# Altium PCB Gate_Driver.PcbDoc
Units mm, origin at the board's own origin, x right, y up, seen from the top; angles counter-clockwise.
Board outline 229.36 x 127 mm, 2 copper layers (Top Layer, Bottom Layer); 105 components, 64 nets, 306 pads, 40 vias.
Unrouted connection lines stored in the file: 133.
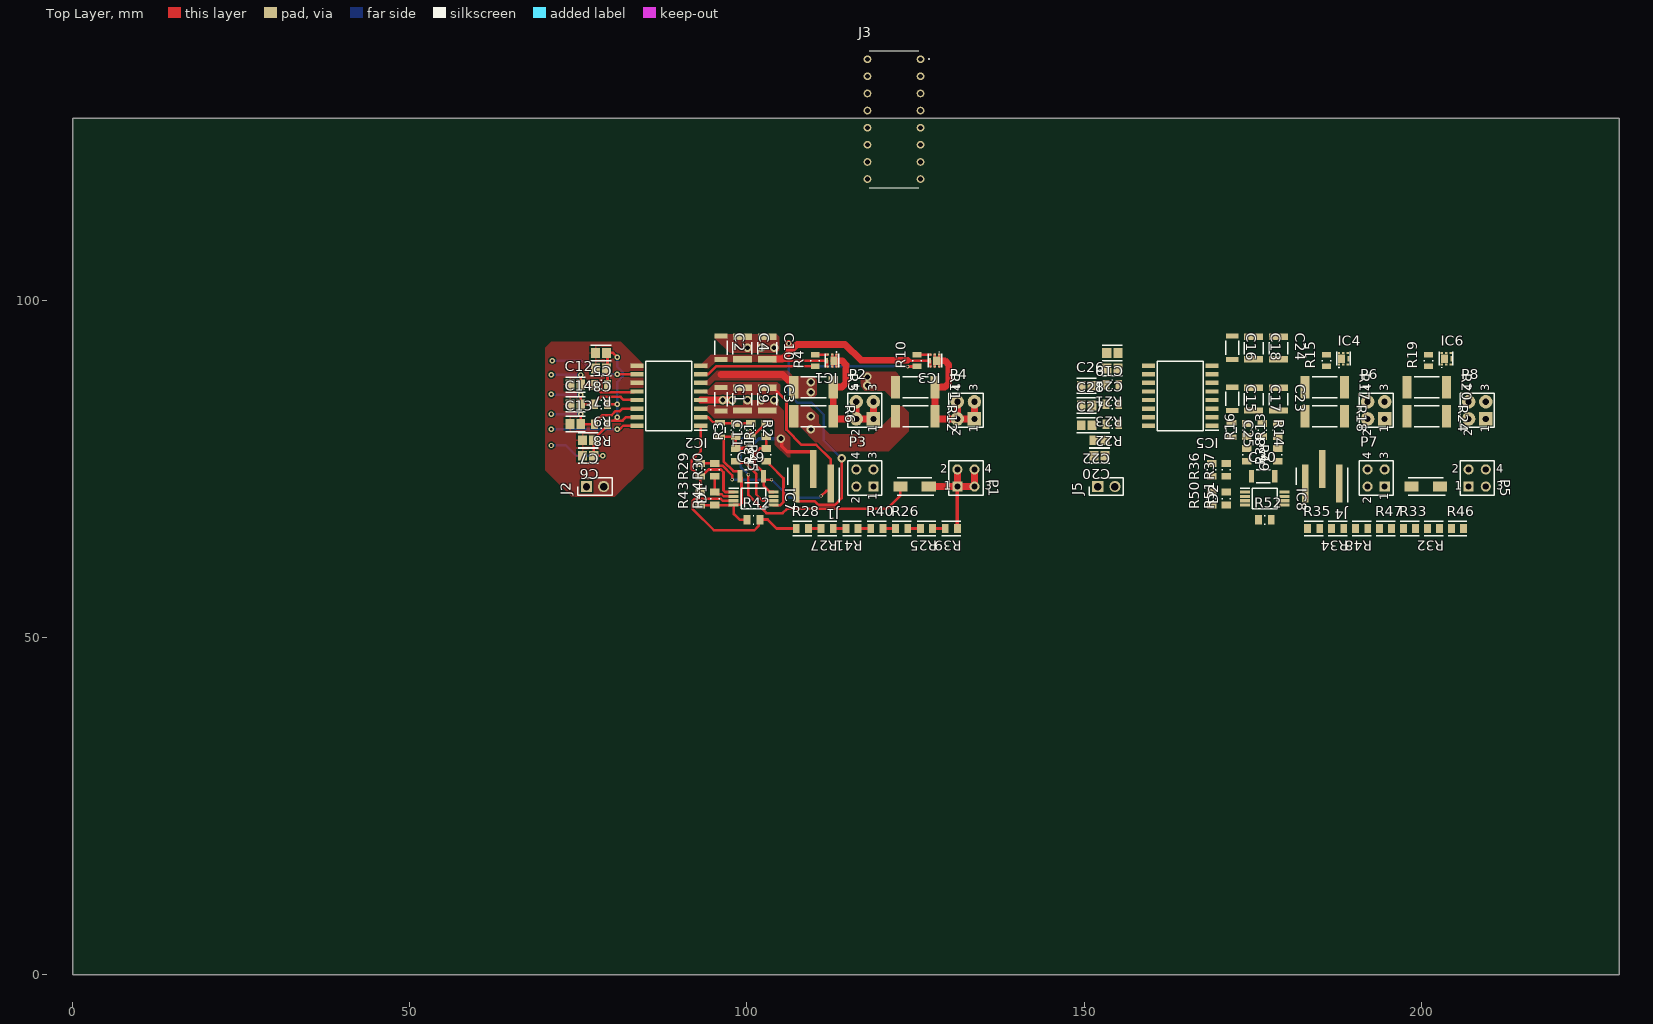
[diagram p0: Top Layer view]
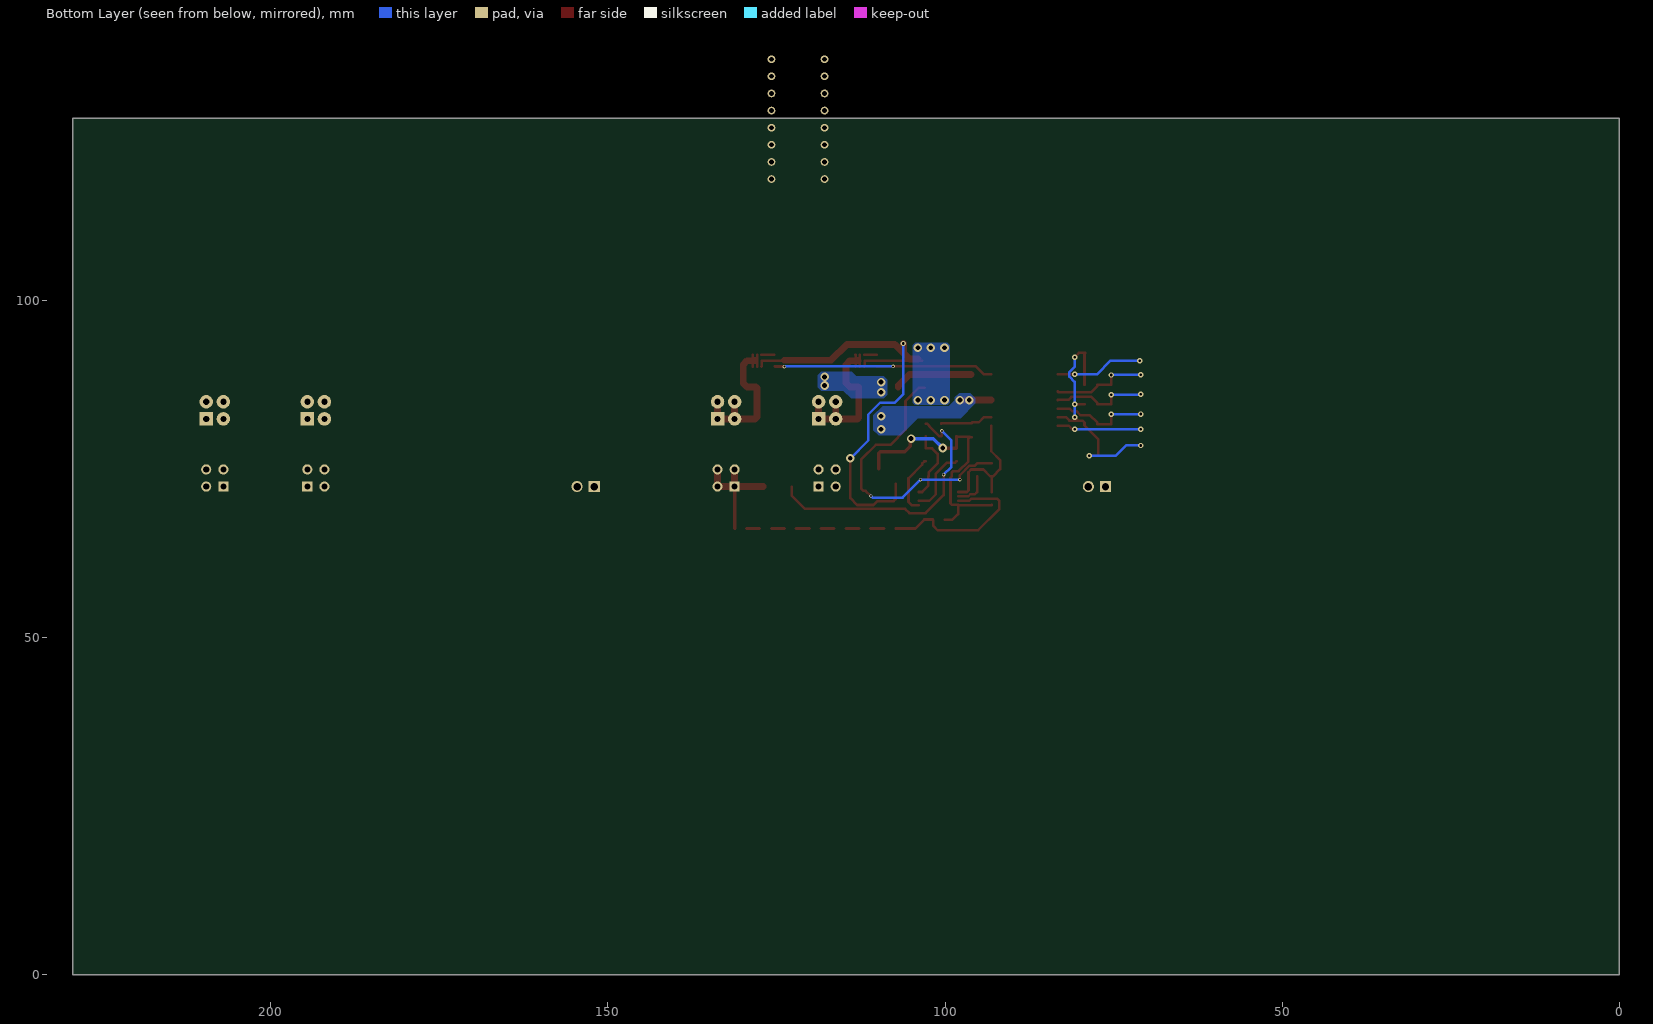
[diagram p1: Bottom Layer view, seen from below]

## Layer stack, top to bottom
Top Solder: solder mask 0.0102, Solder Resist, Dk 3.5
Top Layer: signal copper 0.0356
Dielectric 1: dielectric 0.32, FR-4, Dk 4.8
Bottom Layer: signal copper 0.0356
Bottom Solder: solder mask 0.0102, Solder Resist, Dk 3.5

## Board outline
0,0 229.362,0 229.362,127 0,127

## Design rules (kind name [scope] priority, off if disabled: settings)
Clearance [All] p1: gap=0.2 ignorepadtopadclearanceinfootprint=FALSE except(0: Arc-Hole Track-Hole SMDPad-Hole THPad-Hole Via-Hole Fill-Hole Poly-Hole Region-Hole Text-Hole)
PolygonConnect [All] p1: connectstyle=Direct reliefconductorwidth=0.254 reliefentries=4 polygonreliefangle="90 Angle" airgapwidth=0.254
RoutingVias [All] p1: holewidth=0.4 width=0.8 viastyle="Through Hole" minholewidth=0.3 minwidth=0.5 maxholewidth=3 maxwidth=6
SolderMaskExpansion [All] p1: expansion=0.102
Width [All] p1: maxlimit=1.016 minlimit=0.381 preferedwidth=0.508 minimp=50.000000 maximp=50.000000 favimp=50.000000
30 further rules are at their usual default settings.

## Components (designator, comment, footprint, x,y, rotation, side; value= is the part's Value field where it differs from the comment)
C1 "CGA5L2NP01H104J160AA" FP-CGA5L-0_3-0_1-IPC_B 96.139,85.344 r270 top
C2 "CGA5L2NP01H104J160AA" FP-CGA5L-0_3-0_1-IPC_B 96.139,92.964 r270 top
C3 "CGA6P1X8R1E106K250AC" FP-CGA6P-IPC_B 102.997,85.344 r270 top
C4 "CGA6P1X8R1E106K250AC" FP-CGA6P-IPC_B 99.314,92.916 r270 top
C5 "GCJ21BL81E105KA01L" FP-GCJ21B-0_3-IPC_B 78.359,92.202 r180 top
C6 "GCJ21BL81E105KA01L" FP-GCJ21B-0_3-IPC_B 76.454,76.962 r180 top
C7 "GCJ21BL81H104KA01L" FP-GCJ21B-0_3-IPC_B 76.454,79.248 r180 top
C8 "GCJ21BL81H104KA01L" FP-GCJ21B-0_3-IPC_B 78.359,89.916 r180 top
C9 "CGA6P1X8R1E106K250AC" FP-CGA6P-IPC_B 99.314,85.344 r270 top
C10 "CGA6P1X8R1E106K250AC" FP-CGA6P-IPC_B 102.997,92.916 r270 top
C11 "CGA4C4NP02W122J060AA" FP-CGA4J-IPC_B 96.012,80.772 r270 top
C12 "C0805C101J5HACAUTO" FP-C0805C-DN-IPC_B 74.549,87.503 r0 top value="100 pF"
C13 "C0805C101J5HACAUTO" FP-C0805C-DN-IPC_B 74.549,81.661 r0 top value="100 pF"
C14 "C0805C101J5HACAUTO" FP-C0805C-DN-IPC_B 74.549,84.582 r0 top value="100 pF"
C15 "CGA5L2NP01H104J160AA" FP-CGA5L-0_3-0_1-IPC_B 171.958,85.392 r270 top
C16 "CGA5L2NP01H104J160AA" FP-CGA5L-0_3-0_1-IPC_B 171.958,92.964 r270 top
C17 "CGA6P1X8R1E106K250AC" FP-CGA6P-IPC_B 175.133,85.344 r270 top
C18 "CGA6P1X8R1E106K250AC" FP-CGA6P-IPC_B 175.133,92.916 r270 top
C19 "GCJ21BL81E105KA01L" FP-GCJ21B-0_3-IPC_B 154.178,92.202 r180 top
C20 "GCJ21BL81E105KA01L" FP-GCJ21B-0_3-IPC_B 152.273,76.962 r180 top
C21 "GCJ21BL81H104KA01L" FP-GCJ21B-0_3-IPC_B 154.178,89.916 r180 top
C22 "GCJ21BL81H104KA01L" FP-GCJ21B-0_3-IPC_B 152.273,79.248 r180 top
C23 "CGA6P1X8R1E106K250AC" FP-CGA6P-IPC_B 178.816,85.344 r270 top
C24 "CGA6P1X8R1E106K250AC" FP-CGA6P-IPC_B 178.816,92.916 r270 top
C25 "CGA4C4NP02W122J060AA" FP-CGA4J-IPC_B 171.831,80.773 r270 top
C26 "C0805C101J5HACAUTO" FP-C0805C-DN-IPC_B 150.368,87.329 r0 top value="100 pF"
C27 "C0805C101J5HACAUTO" FP-C0805C-DN-IPC_B 150.368,81.487 r0 top value="100 pF"
C28 "C0805C101J5HACAUTO" FP-C0805C-DN-IPC_B 150.368,84.408 r0 top value="100 pF"
C29 "CGA5L2NP01H104J160AA" FP-CGA5L-0_3-0_1-IPC_B 100.711,73.914 r0 top
C30 "CGA5L2NP01H104J160AA" FP-CGA5L-0_3-0_1-IPC_B 176.53,73.914 r0 top
D1 "RS1M_M2G" DIOM5126X250N 124.841,72.39 r180 top
D2 "RS1M_M2G" DIOM5126X250N 200.66,72.39 r180 top
IC1 "IRFHS8342TRPBF" PQFN(2X2) 113.623,91.059 r180 top
IC2 "UCC21736QDWRQ1" SOIC127P1030X265-16N 88.418,85.852 r180 top
IC3 "IRFHS8342TRPBF" PQFN(2X2) 128.863,91.059 r180 top
IC4 "IRFHS8342TRPBF" PQFN(2X2) 187.442,91.352 r0 top
IC5 "UCC21736QDWRQ1" SOIC127P1030X265-16N 164.237,85.852 r180 top
IC6 "IRFHS8342TRPBF" PQFN(2X2) 202.682,91.352 r0 top
IC7 "LM2903EPWRQ1" SOP65P640X120-8N 100.965,70.612 r0 top
IC8 "LM2903EPWRQ1" SOP65P640X120-8N 176.784,70.612 r0 top
J1 "HW-03-08-T-S-250-SM" HUSRSP3W64P254_762X254X1054P 109.855,73.914 r180 top
J2 "HW-02-08-T-S-250-SM" HDRV2W64P0X254_1X2_508X254X1206P 76.2,72.39 r180 top
J3 "BCS-108-L-D-HE" BCS-108-XXX-D-HE 125.73,135.763 r90 top
J4 "HW-03-08-T-S-250-SM" HUSRSP3W64P254_762X254X1054P 185.293,73.914 r180 top
J5 "HW-02-08-T-S-250-SM" HDRV2W64P0X254_1X2_508X254X1206P 152.019,72.39 r180 top
P1 "Header 2X2" HDR2X2#1 131.191,72.39 r0 top
P2 "Header 2X2" HDR2X2#2 118.745,82.423 r90 top
P3 "Header 2X2" HDR2X2#1 118.745,72.39 r90 top
P4 "Header 2X2" HDR2X2#2 133.731,82.423 r90 top
P5 "Header 2X2" HDR2X2#1 207.01,72.39 r0 top
P6 "Header 2X2" HDR2X2#2 194.564,82.423 r90 top
P7 "Header 2X2" HDR2X2#1 194.564,72.39 r90 top
P8 "Header 2X2" HDR2X2#2 209.55,82.423 r90 top
R1 "CRCW08055K60FKEA" FP-CRCW0805-e3-IPC_B 102.87,80.772 r90 top
R2 "CRCW080510K0FKEA" FP-CRCW0805-e3-IPC_B 100.584,80.772 r270 top
R3 "CRCW08051K60JNEA" FP-CRCW0805-e3-IPC_B 98.298,80.772 r90 top
R4 "CRCW080522R0FKEA" FP-CRCW0805-e3-IPC_C 110.109,91.059 r90 top
R5 "CRCW25124R70JNEG" FP-CRCW2512-e3-IPC_B 109.855,87.122 r0 top
R6 "CRCW25124R30JNEG" FP-CRCW2512-e3-IPC_B 109.855,82.804 r0 top
R7 "CRCW08055K60FKEA" FP-CRCW0805-e3-IPC_B 78.359,87.503 r180 top
R8 "CRCW08055K60FKEA" FP-CRCW0805-e3-IPC_B 78.359,81.661 r180 top
R9 "CRCW08055K60FKEA" FP-CRCW0805-e3-IPC_B 78.359,84.582 r180 top
R10 "CRCW080522R0FKEA" FP-CRCW0805-e3-IPC_C 125.222,91.059 r90 top
R11 "CRCW25124R70JNEG" FP-CRCW2512-e3-IPC_B 124.968,87.122 r0 top
R12 "CRCW25124R30JNEG" FP-CRCW2512-e3-IPC_B 124.968,82.804 r0 top
R13 "CRCW08055K60FKEA" FP-CRCW0805-e3-IPC_B 178.689,80.772 r90 top
R14 "CRCW080510K0FKEA" FP-CRCW0805-e3-IPC_B 176.403,80.772 r270 top
R15 "CRCW080522R0FKEA" FP-CRCW0805-e3-IPC_C 185.928,91.059 r90 top
R16 "CRCW08051K60JNEA" FP-CRCW0805-e3-IPC_B 174.117,80.772 r90 top
R17 "CRCW25124R70JNEG" FP-CRCW2512-e3-IPC_B 185.674,87.122 r0 top
R18 "CRCW25124R30JNEG" FP-CRCW2512-e3-IPC_B 185.674,82.804 r0 top
R19 "CRCW080522R0FKEA" FP-CRCW0805-e3-IPC_C 201.041,91.059 r90 top
R20 "CRCW25124R70JNEG" FP-CRCW2512-e3-IPC_B 200.787,87.122 r0 top
R21 "CRCW08055K60FKEA" FP-CRCW0805-e3-IPC_B 154.178,87.503 r180 top
R22 "CRCW08055K60FKEA" FP-CRCW0805-e3-IPC_B 154.178,81.661 r180 top
R23 "CRCW08055K60FKEA" FP-CRCW0805-e3-IPC_B 154.178,84.582 r180 top
R24 "CRCW25124R30JNEG" FP-CRCW2512-e3-IPC_B 200.787,82.804 r0 top
R25 "RT0805BRD07200KL" FP-RT0805-IPC_B 126.619,66.167 r180 top value=200K?
R26 "RT0805BRD07200KL" FP-RT0805-IPC_B 122.936,66.167 r0 top value=200K?
R27 "RT0805BRD07200KL" FP-RT0805-IPC_B 111.887,66.167 r180 top value=200K?
R28 "RT0805BRD07200KL" FP-RT0805-IPC_B 108.204,66.167 r0 top value=200K?
R29 "CRCW080510K0FKEA" FP-CRCW0805-e3-IPC_B 93.091,74.865 r90 top
R30 "CRCW080510K0FKEA" FP-CRCW0805-e3-IPC_B 95.25,74.865 r90 top
R31 "CRCW080510K0FKEA" FP-CRCW0805-e3-IPC_B 102.87,77.089 r90 top
R32 "RT0805BRD07200KL" FP-RT0805-IPC_B 201.803,66.167 r180 top value=200K?
R33 "RT0805BRD07200KL" FP-RT0805-IPC_B 198.247,66.167 r0 top value=200K?
R34 "RT0805BRD07200KL" FP-RT0805-IPC_B 187.579,66.167 r180 top value=200K?
R35 "RT0805BRD07200KL" FP-RT0805-IPC_B 184.023,66.167 r0 top value=200K?
R36 "CRCW080510K0FKEA" FP-CRCW0805-e3-IPC_B 168.91,74.865 r90 top
R37 "CRCW080510K0FKEA" FP-CRCW0805-e3-IPC_B 171.069,74.865 r90 top
R38 "CRCW080510K0FKEA" FP-CRCW0805-e3-IPC_B 178.689,77.089 r90 top
R39 "RT0805BRD07200KL" FP-RT0805-IPC_B 130.302,66.167 r180 top value=200K?
R40 "RT0805BRD07200KL" FP-RT0805-IPC_B 119.253,66.167 r0 top value=200K?
R41 "RT0805BRD07200KL" FP-RT0805-IPC_B 115.57,66.167 r180 top value=200K?
R42 "CRCW080510K0FKEA" FP-CRCW0805-e3-IPC_B 100.965,67.437 r0 top
R43 "CRCW08055K60FKEA" FP-CRCW0805-e3-IPC_B 93.091,70.612 r90 top
R44 "CRCW08055K60FKEA" FP-CRCW0805-e3-IPC_B 95.25,70.612 r90 top
R45 "CRCW080510K0FKEA" FP-CRCW0805-e3-IPC_B 98.298,77.089 r270 top
R46 "RT0805BRD07200KL" FP-RT0805-IPC_B 205.359,66.167 r0 top value=200K?
R47 "RT0805BRD07200KL" FP-RT0805-IPC_B 194.691,66.167 r0 top value=200K?
R48 "RT0805BRD07200KL" FP-RT0805-IPC_B 191.135,66.167 r180 top value=200K?
R49 "CRCW080510K0FKEA" FP-CRCW0805-e3-IPC_B 174.117,77.089 r270 top
R50 "CRCW08055K60FKEA" FP-CRCW0805-e3-IPC_B 168.91,70.612 r90 top
R51 "CRCW08055K60FKEA" FP-CRCW0805-e3-IPC_B 171.069,70.612 r90 top
R52 "CRCW080510K0FKEA" FP-CRCW0805-e3-IPC_B 176.784,67.437 r0 top

## Footprints (in the part's own frame and the unit in brackets; to place one, negate y for a bottom-side part, rotate by r counter-clockwise, add the part's x,y. Pads: shape width x height; smd on the part's side, far side on the other; paste and mask are expansions set on the pad)
BCS-108-XXX-D-HE [mm]
  round 1.15 hole 0.71: 1(0,0) 2(0,7.87) 3(-2.54,0) 4(-2.54,7.87) 5(-5.08,0) 6(-5.08,7.87) 7(-7.62,0) 8(-7.62,7.87) 9(-10.16,0) 10(-10.16,7.87) 11(-12.7,0) 12(-12.7,7.87) 13(-15.24,0) 14(-15.24,7.87) 15(-17.78,0) 16(-17.78,7.87)
  silkscreen extent -19.05,-1.3 1.27,7.62
DIOM5126X250N [mm]
  rect 2.1x1.5 smd: 1(-2.1,0) 2(2.1,0)
  silkscreen extent -2.85,-1.28 2.57,1.28, body extent -2.57,-1.28 2.57,1.28, height 2.5
FP-C0805C-DN-IPC_B [mm]
  rect 1.305x1.456 smd paste+0 mask+0: 1(-0.801,0) 2(0.801,0)
  silkscreen extent -1.45,-1.13 1.45,1.13, body extent -1.7,-0.98 1.7,0.98, height 0.25
FP-CGA4J-IPC_B [mm]
  rect 0.756x1.456 smd paste+0 mask+0: 1(-1.075,0) 2(1.075,0)
  silkscreen extent -0.4,-0.73 0.4,0.73, body extent -1.7,-0.98 1.7,0.98, height 0.25
FP-CGA5L-0_3-0_1-IPC_B [mm]
  rect 0.756x1.906 smd paste+0 mask+0: 1(-1.725,0) 2(1.725,0)
  silkscreen extent -1.05,-0.95 1.05,0.95, body extent -2.35,-1.2 2.35,1.2, height 0.25
FP-CGA6P-IPC_B [mm]
  rect 0.953x2.804 smd paste+0 mask+0: 1(-1.675,0) 2(1.675,0)
  silkscreen extent -0.9,-1.4 0.9,1.4, body extent -2.4,-1.65 2.4,1.65, height 0.25
FP-CRCW0805-e3-IPC_B [mm]
  rect 1.007x1.408 smd paste+0 mask+0: 1(-0.951,0) 2(0.951,0)
  silkscreen extent -0.07,-0.63 0.07,0.63, body extent -1.7,-0.95 1.7,0.95, height 0.25
FP-CRCW0805-e3-IPC_C [mil]
  rect 31.75x51.5 smd paste+0 mask+0: 1(-33.5,0) 2(33.5,0)
  silkscreen extent -3,-25 3,25, body extent -53,-31 53,31, height 10
FP-CRCW2512-e3-IPC_B [mm]
  rect 1.355x3.308 smd paste+0 mask+0: 1(-2.926,0) 2(2.926,0)
  silkscreen extent -1.87,-1.58 1.87,1.58, body extent -3.85,-1.9 3.85,1.9, height 0.25
FP-GCJ21B-0_3-IPC_B [mm]
  rect 1.353x1.456 smd paste+0 mask+0: 1(-0.825,0) 2(0.825,0)
  silkscreen extent -1.5,-1.13 1.5,1.13, body extent -1.75,-0.98 1.75,0.98, height 0.25
FP-RT0805-IPC_B [mm]
  rect 1.008x1.362 smd paste+0 mask+0: 1(-0.902,0) 2(0.902,0)
  silkscreen extent -1.41,-1.08 1.41,1.08, body extent -1.66,-0.93 1.66,0.93, height 0.25
HDR2X2#1 [mm] "Connector; Header; 2x2 Position"
  rect 1.5x1.5 hole 0.9: 1(0,0)
  round 1.5 hole 0.9: 2(0,2.54) 3(2.54,0) 4(2.54,2.54)
  silkscreen extent -1.27,-1.27 3.81,3.81
HDR2X2#2 [mm] "Connector; Header; 2x2 Position"
  rect 2x2 hole 0.9: 1(0,0)
  round 2 hole 0.9: 2(0,2.54) 3(2.54,0) 4(2.54,2.54)
  silkscreen extent -1.27,-1.27 3.81,3.81
HDRV2W64P0X254_1X2_508X254X1206P [mm]
  rect 1.65x1.65 hole 1.1: 1(0,0)
  round 1.65 hole 1.1: 2(-2.54,0)
  silkscreen extent -3.81,-1.27 1.27,1.27, body extent -3.81,-1.27 1.27,1.27, height 12.06
HUSRSP3W64P254_762X254X1054P [mm]
  rect 0.96x5.59 smd: 1(-2.54,1.078) 2(0,-1.078) 3(2.54,1.078)
  silkscreen extent -3.81,-1.27 3.81,3.87, body extent -3.81,-2.47 3.81,2.47, height 11.81
PQFN(2X2) [mm]
  rect 0.35x0.3 smd: 1(0.35,-0.88) 2(1,-0.88) 3(1.65,-0.88) 4(1.65,0.87) 5(1,0.87) 6(0.35,0.87)
  rect 0.28x0.83 smd: 7(1.744,0)
  rect 1.05x1.25 smd: 8(0.72,0)
  silkscreen extent 0,-1.31 2,1
SOIC127P1030X265-16N [mm]
  rect 1.95x0.65 smd: 1(-4.725,4.445) 2(-4.725,3.175) 3(-4.725,1.905) 4(-4.725,0.635) 5(-4.725,-0.635) 6(-4.725,-1.905) 7(-4.725,-3.175) 8(-4.725,-4.445) 9(4.725,-4.445) 10(4.725,-3.175) 11(4.725,-1.905) 12(4.725,-0.635) 13(4.725,0.635) 14(4.725,1.905) 15(4.725,3.175) 16(4.725,4.445)
  silkscreen extent -5.7,-5.15 3.4,5.15, body extent -5.15,-5.15 5.15,5.15, height 2.65
SOP65P640X120-8N [mm]
  rect 1.475x0.45 smd: 1(-2.938,0.975) 2(-2.938,0.325) 3(-2.938,-0.325) 4(-2.938,-0.975) 5(2.938,-0.975) 6(2.938,-0.325) 7(2.938,0.325) 8(2.938,0.975)
  silkscreen extent -3.67,-1.5 1.85,1.55, body extent -3.2,-1.5 3.2,1.5, height 1.2

## Part data
C1 C2 C15 C16 C29 C30: library part CMP-08246-000628-1, "Cap Ceramic 100nF 50V NP0 5% Pad SMD 1206 +150°C Automotive T/R", Capacitance=100nF, Case/Package=1206, Case Code (Metric)=3216, Max Operating Temperature=150°C, Min Operating Temperature=-55°C, Package Quantity=2000, Ratings=AEC-Q200, Tolerance=5%, Voltage Rating=50V, Case Code (Imperial)=1206, Features="High Temperature", Length=0.126inch, Mount="Surface Mount", Packaging="Tape and Reel", Thickness=0.071inch, Width=0.063inch
C3 C4 C9 C10 C17 C18 C23 C24: library part CMP-08246-001494-1, "Cap Ceramic 10uF 25V X8R 10% Pad SMD 1210 +150°C Automotive T/R", Capacitance=10uF, Case/Package=1210, Case Code (Metric)=3225, Max Operating Temperature=150°C, Min Operating Temperature=-55°C, Ratings=AEC-Q200, Tolerance=10%, Voltage Rating=25V, Case Code (Imperial)=1210, Features="High Temperature", Mount="Surface Mount", Packaging="Cut Tape"
C5 C6 C19 C20: library part CMP-06035-029661-1, "Multilayer Ceramic Capacitors MLCC - SMD/SMT 0805 1uF 10%, 25VDC,  X8L +15/-40%", Capacitance=1uF, Case/Package=0805, Case Code (Metric)=2012, Max Operating Temperature=150°C, Min Operating Temperature=-55°C, Ratings=AEC-Q200, Tolerance=10%, Voltage Rating=25V, Case Code (Imperial)=0805, Features="Soft Termination", Mount="Surface Mount", Packaging="Tape and Reel"
C7 C8 C21 C22: library part CMP-06035-032475-1, "Multilayer Ceramic Capacitors MLCC - SMD/SMT 0805 0.1uF 10%, 50VDC,  X8L +15/-40%", Capacitance=100nF, Case/Package=0805, Case Code (Metric)=2012, Max Operating Temperature=150°C, Min Operating Temperature=-55°C, Ratings=AEC-Q200, Tolerance=10%, Voltage Rating=50V, Case Code (Imperial)=0805, Features="Soft Termination", Mount="Surface Mount", Packaging="Tape and Reel"
C11 C25: library part CMP-08246-000791-1, "Cap Ceramic 1.2nF 450V NP0 5% Pad SMD 0805 +150°C Automotive T/R", Capacitance=1.2nF, Case/Package=0805, Case Code (Metric)=2012, Dielectric=C0G, Max Operating Temperature=150°C, Min Operating Temperature=-55°C, Package Quantity=4000, Ratings=AEC-Q200, Tolerance=5%, Voltage Rating=450V, Case Code (Imperial)=0805, Composition=Ceramic, Features="High Temperature", Height=0.6mm, Lead Free="Lead Free", Length=0.079inch, Mount="Surface Mount", Packaging="Tape and Reel", Termination=SMD/SMT, Thickness=0.03inch, Voltage Rating (DC)=450V, Weight=0.000194oz, Width=0.049inch
C12 C13 C14 C26 C27 C28: library part CMP-03020-020342-1, "CAP CER 0805 100PF 50V ULTRA STA", Capacitance="100 pF", Manufacturer=KEMET, Package=C0805C-DN, Temperature="-55°C to +125°C", Temperature Characteristic=X8R, Temperature Coefficient=30ppm/°C, Temperature Range High=+125°C, Temperature Range Low=-55°C, Tolerance=0.05, Voltage Rating="50 V", Automotive=No, Category=Cap, ComponentLink2Description=Datasheet, ComponentLink2URL=https://content.kemet.com/datasheets/KEM_C1003_C0G_SMD.pdf, Device Class L1="Passive Components", Device Class L2=Capacitors, Device Class L3="Ceramic Capacitors", Digikey Description="CAP CER 0805 100PF 50V ULTRA STA", Height=0.88mm, Ipc Land Pattern Name=CAPC200125X78, Lead Free=Yes, Manufacturer Part Number=C0805C101J5HACAUTO, Material=Ceramic, Mouser Description="Cap Ceramic 100pF 50V X8R 5% Pad SMD 0805 150C Automotive T/R", Octopart=https://octopart.com/c0805c101j5hacauto-kemet-87698063, RoHS=TRUE
D1 D2: "Diode", Arrow Part Number="RS1M M2G", Manufacturer_Name="Taiwan Semiconductor", Mouser Part Number=821-RS1MM2G, Arrow Price/Stock=https://www.arrow.com/en/products/rs1m-m2g/taiwan-semiconductor, Datasheet Link="http://www.mouser.com/datasheet/2/395/RS1A SERIES_K15-1113611.pdf", Height=2.5mm, Manufacturer_Part_Number="RS1M M2G", Mouser Price/Stock=https://www.mouser.com/Search/Refine.aspx?Keyword=821-RS1MM2G
IC1 IC3 IC4 IC6: "Integrated Circuit", Manufacturer_Name=Infineon, Mouser Part Number=942-IRFHS8342TRPBF, Arrow Part Number=IRFHS8342TRPBF, Arrow Price/Stock=https://www.arrow.com/en/products/irfhs8342trpbf/infineon-technologies-ag, Datasheet Link=https://componentsearchengine.com/Datasheets/1/IRFHS8342TRPBF.pdf, Manufacturer_Part_Number=IRFHS8342TRPBF, Mouser Price/Stock=https://www.mouser.co.uk/ProductDetail/Infineon-IR/IRFHS8342TRPBF?qs=Z8%252BeY1k3TILJK9l3AOTdfA%3D%3D
IC2 IC5: "Integrated Circuit", Manufacturer_Name="Texas Instruments", Mouser Part Number=595-UCC21736QDWRQ1, Datasheet Link=https://www.ti.com/lit/ds/symlink/ucc21736-q1.pdf?ts=1610170637293&ref_url=https%253A%252F%252Feu.mouser.com%252F, Height=2.65mm, Manufacturer_Part_Number=UCC21736QDWRQ1, Mouser Price/Stock=https://www.mouser.co.uk/ProductDetail/Texas-Instruments/UCC21736QDWRQ1/?qs=xZ%2FP%252Ba9zWqazxpYJ%2Flne3g%3D%3D
IC7 IC8: "Integrated Circuit", Manufacturer_Name="Texas Instruments", Mouser Part Number=595-LM2903EPWRQ1, Arrow Part Number=LM2903EPWRQ1, Arrow Price/Stock=https://www.arrow.com/en/products/lm2903epwrq1/texas-instruments, Datasheet Link=http://www.ti.com/lit/gpn/LM2903-Q1, Height=1.2mm, Manufacturer_Part_Number=LM2903EPWRQ1, Mouser Price/Stock=https://www.mouser.co.uk/ProductDetail/Texas-Instruments/LM2903EPWRQ1/?qs=gTYE2QTfZfSOOljfli3%2Fvg%3D%3D
J1 J4: "Connector", Manufacturer_Name=SAMTEC, Mouser Part Number=200-HW0308TS250SM, Datasheet Link=https://suddendocs.samtec.com/catalog_english/hw_sm.pdf, Manufacturer_Part_Number=HW-03-08-T-S-250-SM, Mouser Price/Stock=https://www.mouser.co.uk/ProductDetail/Samtec/HW-03-08-T-S-250-SM/?qs=0lQeLiL1qyYO841owomMXg%3D%3D
J2 J5: "Connector", Manufacturer_Name=SAMTEC, Mouser Part Number=200-HW0208TS250SM, Arrow Part Number=HW-02-08-T-S-250-SM, Arrow Price/Stock=https://www.arrow.com/en/products/hw-02-08-t-s-250-sm/samtec, Datasheet Link=https://componentsearchengine.com/Datasheets/1/HW-02-08-T-S-250-SM.pdf, Height=12.06mm, Manufacturer_Part_Number=HW-02-08-T-S-250-SM, Mouser Price/Stock=https://www.mouser.co.uk/ProductDetail/Samtec/HW-02-08-T-S-250-SM/?qs=rU5fayqh%252BE1s4vm9JrxQkw%3D%3D, System=Connector
J3: "Connector", Manufacturer_Name=SAMTEC, Datasheet Link=http://suddendocs.samtec.com/prints/bcs-1xx-xxx-x-xx-xxx-mkt.pdf, Manufacturer_Part_Number=BCS-108-L-D-HE, System=Connector
P1 P2 P3 P4 P5 P6 P7 P8: "Header, 2-Pin, Dual row", LatestRevisionDate=17-Jul-2002, LatestRevisionNote="Re-released for DXP Platform.", Publisher="Altium Limited", System=Connector
R1 R7 R8 R9 R13 R21 R22 R23 R43 R44 R50 R51: library part CMP-2001-04030-2, "RES Thick Film, 5.6k?, 1%, 0.125W, 100ppm/°C, 0805", Case/Package=0805, Case Code (Metric)=2012, Max Operating Temperature=155°C, Max Power Dissipation=125mW, Min Operating Temperature=-55°C, Package Quantity=1, Resistance=5.6kR, Temperature Coefficient=100ppm/°C, Tolerance=1%, Voltage Rating=150V, Case Code (Imperial)=0805, Composition="Thick Film", Contact Plating=Tin, Depth=1.25mm, Features="Automotive AEC-Q200", Height=0.45mm, Lead Free="Lead Free", Length=2mm, Military Standard=Not, Mount="Surface Mount", Number of Pins=2, Number of Terminations=2, Packaging="Tape and Reel", Power Rating=125mW, Radiation Hardening=No, Termination=SMD/SMT, Voltage Rating (DC)=150V, Weight=0.000194oz, Width=1.25mm
R2 R14 R29 R30 R31 R36 R37 R38 R42 R45 R49 R52: library part CMP-2001-04908-2, "RES Thick Film, 10k?, 1%, 0.125W, 100ppm/°C, 0805", Case/Package=0805, Case Code (Metric)=2012, Max Operating Temperature=155°C, Min Operating Temperature=-55°C, Package Quantity=5000, Power Rating=125mW, Resistance=10kR, Temperature Coefficient=100ppm/°C, Tolerance=1%, Voltage Rating=150V, Case Code (Imperial)=0805, Composition="Thick Film", Contact Plating=Tin, Depth=1.25mm, Height=0.45mm, Lead Free="Lead Free", Length=2mm, Military Standard=Not, Packaging="Tape and Reel", Radiation Hardening=No, Termination=SMD/SMT, Voltage Rating (DC)=150V, Weight=0.000194oz, Width=1.25mm
R3 R16: library part CMP-1013-00079-3, "RES Thick Film, 1.6k?, 5%, 0.125W, 200ppm/°C, 0805", Case/Package=0805, Case Code (Metric)=2012, Max Operating Temperature=155°C, Max Power Dissipation=125mW, Min Operating Temperature=-55°C, Package Quantity=1, Resistance=1.6kR, Temperature Coefficient=200ppm/°C, Tolerance=5%, Voltage Rating=150V, Case Code (Imperial)=0805, Composition="Thick Film", Contact Plating=Tin, Depth=1.25mm, Features="Automotive AEC-Q200", Height=0.02inch, Lead Free="Lead Free", Length=2mm, Military Standard=Not, Number of Terminations=2, Packaging="Tape and Reel", Power Rating=125mW, Radiation Hardening=No, Voltage Rating (DC)=150V, Weight=0.000194oz, Width=0.049inch
R4 R10 R15 R19: library part CMP-2001-03692-2, "RES Thick Film, 22?, 1%, 0.125W, 100ppm/°C, 0805", Case/Package=0805, Case Code (Metric)=2012, Max Operating Temperature=155°C, Max Power Dissipation=125mW, Min Operating Temperature=-55°C, Package Quantity=5000, Resistance=22R, Temperature Coefficient=100ppm/°C, Tolerance=1%, Voltage Rating=150V, Case Code (Imperial)=0805, Composition="Thick Film", Contact Plating=Tin, Depth=1.25mm, Features="Automotive AEC-Q200", Height=0.45mm, Lead Free="Lead Free", Length=2mm, Military Standard=Not, Mount="Surface Mount", Number of Terminations=2, Packaging="Tape and Reel", Power Rating=125mW, Radiation Hardening=No, Termination=SMD/SMT, Voltage Rating (DC)=150V, Weight=0.000194oz, Width=1.25mm
R5 R11 R17 R20: library part CMP-1018-00018-2, "RES Thick Film, 4.7?, 5%, 1W, 200ppm/°C, 2512", Case/Package=2512, Case Code (Metric)=6432, Max Operating Temperature=155°C, Max Power Dissipation=1W, Min Operating Temperature=-55°C, Package Quantity=2000, Resistance=4.7R, Temperature Coefficient=200ppm/°C, Tolerance=5%, Voltage Rating=500V, Case Code (Imperial)=2512, Composition="Thick Film", Contact Plating=Tin, Depth=3.15mm, Features="Automotive AEC-Q200", Height=0.6mm, Lead Free="Lead Free", Length=6.3mm, Military Standard=Not, Mount="Surface Mount", Number of Pins=2, Number of Terminations=2, Packaging="Tape and Reel", Power Rating=1W, Radiation Hardening=No, Termination=SMD/SMT, Voltage Rating (DC)=500V, Weight=0.001429oz, Width=3.15mm
R6 R12 R18 R24: library part CMP-1018-00017-2, "RES Thick Film, 4.3?, 5%, 1W, 200ppm/°C, 2512", Case/Package=2512, Case Code (Metric)=6432, Max Operating Temperature=155°C, Max Power Dissipation=1W, Min Operating Temperature=-55°C, Package Quantity=2000, Resistance=4.3R, Temperature Coefficient=200ppm/°C, Tolerance=5%, Voltage Rating=500V, Case Code (Imperial)=2512, Composition="Thick Film", Contact Plating=Tin, Depth=3.15mm, Features="Automotive AEC-Q200", Height=0.028inch, Lead Free="Lead Free", Length=6.3mm, Military Standard=Not, Number of Pins=2, Number of Terminations=2, Packaging="Tape and Reel", Power Rating=1W, Radiation Hardening=No, Termination=SMD/SMT, Voltage Rating (DC)=500V, Weight=0.001429oz, Width=0.124inch
R25 R26 R27 R28 R32 R33 R34 R35 R39 R40 R41 R46 R47 R48: library part CMP-2001-01722-2, "RES SMD 200K OHM 0.1% 1/8W 0805", Manufacturer=Yageo, Package=RT0805, Power Rating=0.125W, Resistance=200K?, Temperature="-55°C to +155°C", Temperature Coefficient="25 ppm/°C", Temperature Range High=+155°C, Temperature Range Low=-55°C, Tolerance=0.0025, Voltage Rating=150V, Automotive=No, Category=Res, ComponentLink2Description=Datasheet, ComponentLink2URL=http://www.yageo.com/documents/recent/PYu-RT_1-to-0.01_RoHS_L_9.pdf, Composition="Thin Film", Device Class L1="Passive Components", Device Class L2=Resistors, Device Class L3="Chip SMD Resistors", Digikey Description="RES SMD 200K OHM 0.1% 1/8W 0805", Footprint Url=http://www.yageo.com/exep/pages/download/literatures/PYu-R_Mount_10.pdf, Height=0.6mm, Ipc Land Pattern Name=RESC200125X50, Lead Free=Yes, Manufacturer Part Number=RT0805BRD07200KL, Mouser Description="High Precision-High Stability Chip Resistor Thin Film 0805 200kOhm 0.1% Paper T/R", Octopart=https://octopart.com/rt0805brd07200kl-yageo-1477199, RoHS=TRUE, Series=RT

## Via types
v1: diameter 1.27, hole 0.711, Top Layer to Bottom Layer, 17 vias
v2: diameter 0.8, hole 0.4, Top Layer to Bottom Layer, 16 vias
v3: diameter 0.5, hole 0.3, Top Layer to Bottom Layer, 7 vias

## Nets (pads, with @x,y where several pads share a name; then routed paths per layer and width w, separated by ;. In a path a pad name is that pad's centre, name@x,y a point inside that pad or via, vN(x,y) a via of type N, cw(c..) or ccw(c..) an arc to the next point about the centre after c; other vN are vias at no path point)
+18V_H: C1.1 C3.1 C9.1 C29.2 IC2.5 IC7.8 J1.1 R1.1 R29.2 R30.2 R31.2 | length 55.1
  Top Layer w0.381: R29.2 R30.2 95.563,75.503 96.352,75.503 97.79,74.065 v3(97.79,73.406) ; R1.1 R31.2 101.916,78.04 101.092,77.216 101.092,75.833 102.436,74.489 C29.2 102.489,73.861 C29.2@102.489,73.406 ; C3.1 103.923,87.019 105.861,85.08 105.861,80.829 108.112,78.578 110.271,78.578 112.395,76.454 J1.1 112.395,72.045 112.105,71.755 111.76,71.755 v3(110.998,70.993) ; v3(103.632,73.406) C29.2@102.489,73.406 ; IC7.8 103.39,71.587 102.489,72.488 C29.2@102.489,73.406
  Bottom Layer w0.381: v3(97.79,73.406) v3(103.632,73.406) 106.299,70.739 110.744,70.739 v3(110.998,70.993)
+18V_L: C15.1 C17.1 C23.1 C30.2 IC5.5 IC8.8 J4.1 R13.1 R36.2 R37.2 R38.2
-7V_H: C2.2 C4.2 C10.2 IC1.4 IC1.7 IC2.8 IC3.4 IC3.7 J1.3 | length 74
  Top Layer w0.381: C10.2@103.378,91.059 IC1.7 111.93,91.008 111.93,90.232 IC1.4 ; J1.3 107.315,70.521 107.605,70.232 110.03,70.232 110.611,69.651 113.037,69.651 114.046,70.66 v1(114.046,76.581) ; 123.844,91.059 IC3.7 127.17,91.008 127.17,90.232 IC3.4
  Top Layer w1.016: C10.2@103.958,91.313 105.283,91.313 106.172,92.202 ; v2(106.172,93.599) 106.172,92.202 ; 123.844,91.128 116.898,91.128 114.554,93.472 107.442,93.472 106.172,92.202
  Bottom Layer w0.381: v2(106.172,93.599) 106.172,86.106 107.442,84.836 109.601,84.836 111.379,83.058 111.379,79.248 v1(114.046,76.581)
-7V_L: C16.2 C18.2 C24.2 IC4.4 IC4.7 IC5.8 IC6.4 IC6.7 J4.3
DC-DC_12V_H: J2.1 J3.1
DC-DC_12V_L: J3.16 J5.1
GND_H: C5.2 C6.2 C7.2 C8.2 C12.1 C13.1 C14.1 IC2.9 IC2.11 J2.2 J3.3
GND_L: C19.2 C20.2 C21.2 C22.2 C26.1 C27.1 C28.1 IC5.9 IC5.11 J3.14 J5.2
H_APWM: IC2.16 J3.15 | length 12.2
  Top Layer w0.381: v2@81.026,80.899 81.139,80.899 81.647,81.407 IC2.16@83.26,81.407
  Bottom Layer w0.381: v2(70.993,80.899) v2(80.772,80.899)
H_ASC: IC2.1 IC7.1 R29.1 R43.2 | length 19.4
  Top Layer w0.381: R43.2 R29.1 ; IC2.1 93.143,77.627 91.821,76.305 91.821,74.983 92.89,73.914 R29.1 ; IC7.1 96.743,71.587 96.52,71.81 96.52,74.513 96.111,74.922 94.3,74.922 93.292,73.914 R29.1
H_CLMP: IC2.7 R4.1 R10.1 | length 35
  Top Layer w0.381: IC2.7 94.234,89.027 95.415,90.208 v3(107.697,90.208) R4.1 ; v3(123.825,90.17) 123.844,90.189 125.203,90.189 R10.1
  Bottom Layer w0.381: v3(107.697,90.208) 123.787,90.208 v3(123.825,90.17)
H_COLLECTOR: D1.1 P1.1 P1.2 P1.3 P1.4 R39.1 | length 18.1
  Top Layer w0.508: P1.1 131.197,72.384 131.197,66.173 R39.1
  Top Layer w1.016: D1.1 P1.1 ; P1.2 P1.1 ; P1.4 P1.3 P1.1
H_EMITTER: C1.2 C2.1 C3.2 C4.1 C9.2 C10.1 C11.2 C29.1 IC2.3 IC7.4 J1.2 P3.1 P3.2 P3.3 P3.4 R3.1 R42.1 R43.1 R44.1 R45.1 | length 41.4
  Top Layer w0.381: R43.1 93.103,69.649 98.015,69.649 IC7.4 ; C11.2 96.362,79.697 96.55,79.509 96.55,76.127 98,74.677 98.798,74.677 98.986,74.489 C29.1 99.187,73.713 99.187,69.895 98.964,69.671 98.061,69.671 IC7.4 ; C11.2@96.362,79.759 98.236,79.759 R3.1 R45.1 ; R42.1 98.933,67.437 98.044,68.326 98.044,69.62 IC7.4
  Top Layer w0.508: R45.1 100.265,78.04 v1(100.33,78.105) ; v1(105.029,79.502) 105.175,79.356 105.175,78.34 105.982,77.533 109.629,77.533 109.855,77.307 J1.2
  Bottom Layer w0.508: v1(100.33,78.105) 101.727,79.502 v1(105.029,79.502)
  other v1: 100.076,85.217 102.108,85.217 104.013,85.217 100.076,92.964 102.108,92.964 104.013,92.964
H_FLT: C14.2 IC2.13 J3.11 R9.2 | length 14.5
  Top Layer w0.381: v2(75.35,86.018) C14.2 R9.2 77.408,84.783 78.305,85.68 81.271,85.68 81.713,85.238 83.239,85.238 IC2.13@83.26,85.217
  Bottom Layer w0.381: v2(70.993,86.057) 71.032,86.018 v2(75.35,86.018)
H_GATE_1: IC1.1 IC1.2 IC1.5 IC1.6 IC1.8 P2.1 P2.2 P2.3 P2.4 R5.2 R6.2 | length 26.1
  Top Layer w0.381: IC1.5 112.623,90.779 IC1.8 ; IC1.2 112.623,91.339 IC1.8 ; IC1.8@113.238,90.724 113.238,90.225 IC1.6 ; IC1.1 113.238,91.903 113.238,91.394 IC1.8
  Top Layer w1.016: IC1.8 112.915,91.047 114.086,91.047 114.681,90.452 114.681,87.757 114.086,87.162 112.82,87.162 R5.2 R6.2 112.781,82.592 112.95,82.423 P2.2 ; P2.4 P2.2 ; P2.3 P2.1 P2.2
H_GATE_2: IC3.1 IC3.2 IC3.5 IC3.6 IC3.8 P4.1 P4.2 P4.3 P4.4 R11.2 R12.2 | length 26.2
  Top Layer w0.381: IC3.5 127.863,90.779 IC3.8 ; IC3.2 127.863,91.339 IC3.8 ; IC3.8@128.478,90.724 128.478,90.225 IC3.6 ; IC3.1 128.478,91.903 128.478,91.394 IC3.8
  Top Layer w1.016: IC3.8 128.155,91.047 129.326,91.047 129.921,90.452 129.921,87.757 129.326,87.162 128.06,87.162 127.889,86.99 127.889,82.724 128.19,82.423 P4.2 ; P4.4@131.445,84.963 131.191,84.709 P4.2 ; P4.3@133.985,84.963 133.731,84.709 P4.1 P4.2
H_IN+: IC2.10 J3.7 | length 13
  Top Layer w0.381: v2(80.772,89.027) IC2.10@83.26,89.027
  Bottom Layer w0.381: v2(71.12,91.059) 75.438,91.059 77.47,89.027 v2(80.772,89.027)
H_OC: C11.1 IC2.2 R2.1 R3.2 | length 7.8
  Top Layer w0.381: IC2.2 94.234,82.677 94.996,81.915 95.944,81.915 C11.1 96.074,81.785 100.522,81.785 R2.1
H_OUT_L: IC2.6 R5.1 R11.1 | length 11.7
  Top Layer w1.016: 96.139,89.027 105.283,89.027 106.929,87.381 R5.1
  other v1: 109.474,86.36 117.856,87.376 109.474,87.884 117.856,88.646
H_OUT_R: IC2.4 R6.1 R12.1 | length 4.6
  Top Layer w1.016: IC2.4 v1(96.393,85.217) v1(97.79,85.217)
  other v1: 109.474,80.899 109.474,82.804
H_RDY: C12.2 IC2.12 J3.9 R7.2 | length 14.3
  Top Layer w0.381: v2(75.35,88.939) C12.2 R7.2 77.408,87.302 78.305,86.405 83.178,86.405 IC2.12@83.26,86.487
  Bottom Layer w0.381: v2(70.993,88.978) 71.032,88.939 v2(75.35,88.939)
H_RST: C13.2 IC2.14 J3.13 R8.2 | length 14.8
  Top Layer w0.381: v2(75.35,83.097) C13.2 R8.2 77.408,81.862 78.54,82.994 79.946,82.994 80.518,83.566 81.143,83.566 81.524,83.947 IC2.14@83.26,83.947
  Bottom Layer w0.381: v2(70.993,83.136) 71.032,83.097 v2(75.35,83.097)
H_VCC: C5.1 C6.1 C7.1 C8.1 IC2.15 J3.5 R7.1 R8.1 R9.1 | length 38.1
  Top Layer w0.381: v2(78.613,76.962) C6.1 C7.1 77.279,79.43 79.31,81.46 R8.1 79.31,81.862 79.623,82.175 80.283,82.175 ; R9.1 v2(80.772,84.582) ; R7.1 79.31,92.077 C5.1 80.137,92.202 v2(80.772,91.567) ; v2@80.899,82.677 80.786,82.677 80.283,82.175 ; IC2.15@83.26,82.677 82.042,82.677 81.54,82.175 80.283,82.175
  Bottom Layer w0.381: v2(70.993,78.486) 73.152,78.486 74.676,76.962 v2(78.613,76.962) ; v2(80.772,91.567) 80.772,90.149 81.566,89.356 81.566,88.698 80.772,87.905 v2(80.772,84.582) 80.772,82.804 v2@80.899,82.677
  other v2: 80.772,82.677
L_APWM: IC5.16 J3.2
L_ASC: IC5.1 IC8.1 R36.1 R50.2
L_CLMP: IC5.7 R15.1 R19.1
L_COLLECTOR: D2.1 P5.1 P5.2 P5.3 P5.4 R46.1
L_EMITTER: C15.2 C16.1 C17.2 C18.1 C23.2 C24.1 C25.2 C30.1 IC5.3 IC8.4 J4.2 P7.1 P7.2 P7.3 P7.4 R16.1 R49.1 R50.1 R51.1 R52.1
L_FLT: C28.2 IC5.13 J3.6 R23.2
L_GATE_1: IC4.1 IC4.2 IC4.5 IC4.6 IC4.8 P6.1 P6.2 P6.3 P6.4 R17.2 R18.2
L_GATE_2: IC6.1 IC6.2 IC6.5 IC6.6 IC6.8 P8.1 P8.2 P8.3 P8.4 R20.2 R24.2
L_IN+: IC5.10 J3.10
L_OC: C25.1 IC5.2 R14.1 R16.2
L_OUT_L: IC5.6 R17.1 R20.1
L_OUT_R: IC5.4 R18.1 R24.1
L_RDY: C26.2 IC5.12 J3.8 R21.2
L_RST: C27.2 IC5.14 J3.4 R22.2
L_VCC: C19.1 C20.1 C21.1 C22.1 IC5.15 J3.12 R21.1 R22.1 R23.1
NetD1_2: D1.2 R1.2 R2.2 | length 40.6
  Top Layer w0.381: v3(100.203,74.168) 100.203,71.12 102.87,68.453 105.283,68.453 105.9,69.07 120.742,69.07 122.741,71.068 D1.2 ; v3(100.457,80.645) 100.457,79.948 R2.2 100.785,79.821 102.356,81.393 102.356,81.41 102.669,81.723 R1.2
  Bottom Layer w0.381: v3(100.203,74.168) 99.06,75.311 99.06,79.248 v3(100.457,80.645)
NetD2_2: D2.2 R13.2 R14.2
NetIC1_3: IC1.3 R4.2 | length 1.9
  Top Layer w0.381: R4.2 111.944,91.91 IC1.3
NetIC3_3: IC3.3 R10.2 | length 1.9
  Top Layer w0.381: R10.2@125.349,91.91 127.184,91.91 IC3.3
NetIC4_3: IC4.3 R15.2
NetIC6_3: IC6.3 R19.2
NetIC7_2: IC7.2 R30.1 R44.2 | length 5.4
  Top Layer w0.381: R30.1 R44.2 95.563,71.25 96.258,71.25 96.572,70.937 IC7.2
NetIC7_3: IC7.3 R28.1 R42.2 | length 25.9
  Top Layer w0.381: IC7.3 96.384,70.287 96.059,70.612 92.282,70.612 91.979,70.309 91.979,69.014 95.08,65.913 101.092,65.913 101.727,66.548 101.727,67.383 101.848,67.504 103.057,67.504 104.394,66.167 R28.1
NetIC7_5: IC7.5 R31.1 | length 8.9
  Top Layer w0.381: R31.1 103.071,76.138 103.384,75.825 103.384,75.625 105.41,73.598 105.41,70.104 104.943,69.637 IC7.5
NetIC7_6: IC7.6 R45.2 | length 9.8
  Top Layer w0.381: R45.2 98.496,75.94 99.701,75.94 101.346,74.295 101.346,71.247 102.306,70.287 IC7.6
NetIC8_2: IC8.2 R37.1 R51.2
NetIC8_3: IC8.3 R35.1 R49.2
NetIC8_5: IC8.5 R38.1
NetIC8_6: IC8.6 R52.2
NetR25_1: R25.1 R39.2 | length 1.9
  Top Layer w0.508: R25.1 R39.2
NetR25_2: R25.2 R26.2 | length 1.9
  Top Layer w0.508: R26.2 R25.2
NetR26_1: R26.1 R40.2 | length 1.9
  Top Layer w0.508: R40.2 R26.1
NetR27_1: R27.1 R41.2 | length 1.9
  Top Layer w0.508: R27.1 R41.2
NetR27_2: R27.2 R28.2 | length 1.9
  Top Layer w0.508: R28.2 R27.2
NetR32_1: R32.1 R46.2
NetR32_2: R32.2 R33.2
NetR33_1: R33.1 R47.2
NetR34_1: R34.1 R48.2
NetR34_2: R34.2 R35.2
NetR40_1: R40.1 R41.1 | length 1.9
  Top Layer w0.508: R41.1 R40.1
NetR47_1: R47.1 R48.1
pads on no net: IC7.7 IC8.7

## Polygon pours and split planes (outlines as drawn)
H_OUT_R on Top Layer (solid, remove dead copper, pour order 6): 121.602,83.312 121.602,82.931 118.809,80.137 112.268,80.137 110.617,81.788 110.617,82.931 109.093,84.455 106.553,84.455 106.553,81.153 107.95,81.153 111.506,77.597 121.031,77.597 124.016,80.581 124.015,83.439 123.126,84.328 122.618,84.328
GND_H on Top Layer (solid, remove dead copper, pour order 28): 84.582,90.551 81.28,93.853 70.993,93.853 70.104,92.964 70.104,74.803 74.041,70.866 80.391,70.866 84.582,75.057
H_EMITTER on Top Layer (solid, remove dead copper, pour order 24): 104.648,84.455 104.648,85.217 99.441,85.217 99.441,84.455
H_EMITTER on Top Layer (solid, remove dead copper, pour order 22): 95.25,94.361 97.409,92.202 104.394,92.202 104.775,92.583 104.775,94.615 104.394,94.996 95.377,94.996 95.25,94.869
-7V_H on Top Layer (solid, remove dead copper, pour order 20): 105.537,90.932 95.377,90.932 94.361,89.916 93.726,89.916 93.154,90.487 93.599,90.932 94.615,91.948 105.537,91.948
H_OUT_L on Top Layer (solid, remove dead copper, pour order 18): 95.504,89.535 94.107,88.138 93.853,88.138 93.726,88.011 93.726,87.503 93.853,87.376 94.488,87.376 95.25,88.138 107.442,88.138 106.045,89.535
H_OUT_L on Top Layer (solid, remove dead copper, pour order 14): 107.061,88.773 109.855,88.773 110.363,88.265 110.363,85.979 109.855,85.471 107.061,85.471
H_OUT_L on Top Layer (solid, remove dead copper, pour order 8): 121.412,85.598 120.396,86.614 117.475,86.614 116.84,87.249 116.84,88.773 117.475,89.408 122.047,89.408 122.682,88.773 122.682,85.598
+18V_H on Top Layer (solid, remove dead copper, pour order 2): 93.472,86.233 93.98,86.233 94.234,85.979 104.521,85.979 104.902,86.36 104.902,87.503 104.521,87.884 95.377,87.884 94.234,86.741 93.472,86.741
H_EMITTER on Top Layer (solid, remove dead copper, pour order 0): 93.726,84.201 93.98,84.201 94.234,84.455 104.648,84.455 105.664,83.439 105.664,80.899 106.426,80.137 106.426,76.708 106.045,76.708 104.14,78.613 104.14,82.042 103.632,82.55 95.123,82.55 93.98,83.693 93.726,83.693
H_EMITTER on Bottom Layer (solid, remove dead copper, pour order 26): 99.695,84.455 104.394,84.455 104.775,84.836 104.775,93.345 104.394,93.726 99.695,93.726 99.314,93.345 99.314,84.836
H_OUT_L on Bottom Layer (solid, remove dead copper, pour order 16): 108.585,85.979 109.093,85.471 113.919,85.471 115.062,86.614 118.364,86.614 118.872,87.122 118.872,88.9 118.364,89.408 113.792,89.408 113.157,88.773 109.093,88.773 108.585,88.265
H_OUT_R on Bottom Layer (solid, remove dead copper, pour order 10): 96.266,86.233 95.504,85.471 95.504,84.709 97.663,82.55 104.013,82.55 105.283,81.28 106.553,80.01 109.855,80.01 110.617,80.772 110.617,82.931 109.22,84.328 99.441,84.328 98.552,85.217 98.552,85.598 97.917,86.233 97.282,86.233

## Text inside footprints (layer, text, board x,y; h text height)
P1: Top Overlay "1" at 129.159,71.882 h1.27; Top Overlay "2" at 128.651,74.422 h1.27; Top Overlay "4" at 135.255,74.422 h1.27; Top Overlay "3" at 135.255,71.882 h1.27
P2: Top Overlay "1" at 119.253,80.391 h1.27 r90; Top Overlay "2" at 116.713,79.883 h1.27 r90; Top Overlay "4" at 116.713,86.487 h1.27 r90; Top Overlay "3" at 119.253,86.487 h1.27 r90
P3: Top Overlay "1" at 119.253,70.358 h1.27 r90; Top Overlay "2" at 116.713,69.85 h1.27 r90; Top Overlay "4" at 116.713,76.454 h1.27 r90; Top Overlay "3" at 119.253,76.454 h1.27 r90
P4: Top Overlay "1" at 134.239,80.391 h1.27 r90; Top Overlay "2" at 131.699,79.883 h1.27 r90; Top Overlay "4" at 131.699,86.487 h1.27 r90; Top Overlay "3" at 134.239,86.487 h1.27 r90
P5: Top Overlay "1" at 204.978,71.882 h1.27; Top Overlay "2" at 204.47,74.422 h1.27; Top Overlay "4" at 211.074,74.422 h1.27; Top Overlay "3" at 211.074,71.882 h1.27
P6: Top Overlay "1" at 195.072,80.391 h1.27 r90; Top Overlay "2" at 192.532,79.883 h1.27 r90; Top Overlay "4" at 192.532,86.487 h1.27 r90; Top Overlay "3" at 195.072,86.487 h1.27 r90
P7: Top Overlay "1" at 195.072,70.358 h1.27 r90; Top Overlay "2" at 192.532,69.85 h1.27 r90; Top Overlay "4" at 192.532,76.454 h1.27 r90; Top Overlay "3" at 195.072,76.454 h1.27 r90
P8: Top Overlay "1" at 210.058,80.391 h1.27 r90; Top Overlay "2" at 207.518,79.883 h1.27 r90; Top Overlay "4" at 207.518,86.487 h1.27 r90; Top Overlay "3" at 210.058,86.487 h1.27 r90